# Altium PCB Analog Hall Board.PcbDoc
Units mil, origin at the board's own origin, x right, y up, seen from the top; angles counter-clockwise.
Board outline 750 x 750 mil, 2 copper layers (Top Layer, Bottom Layer); 3 components, 8 nets, 29 pads, 2 vias.
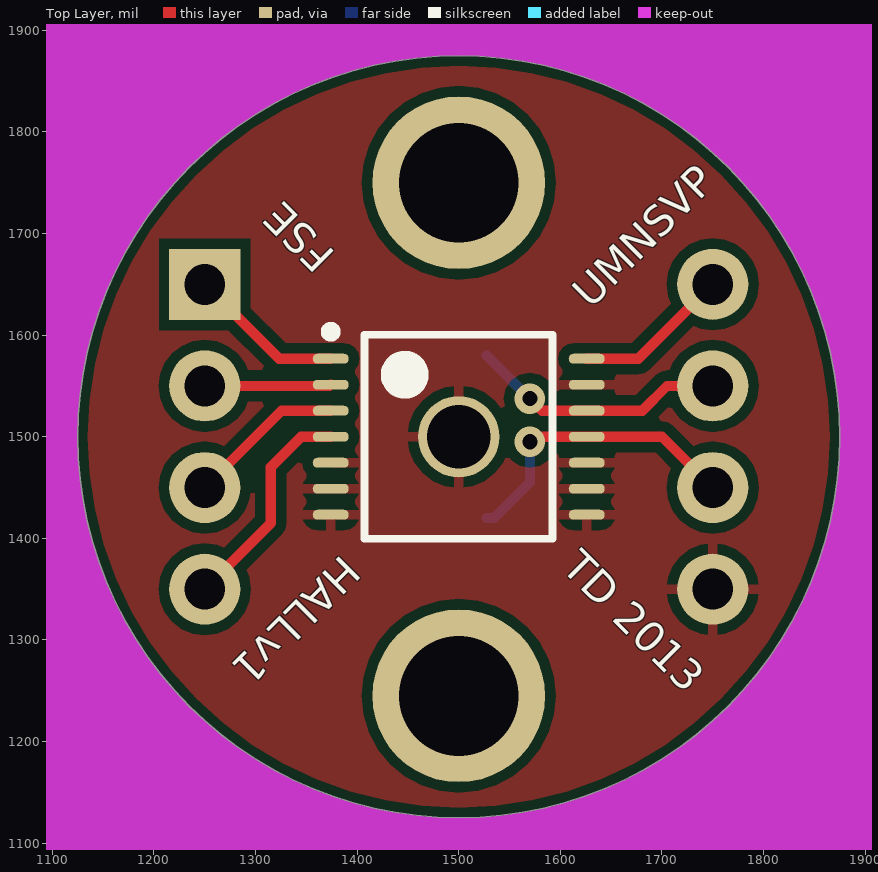
[diagram p0: Top Layer view]
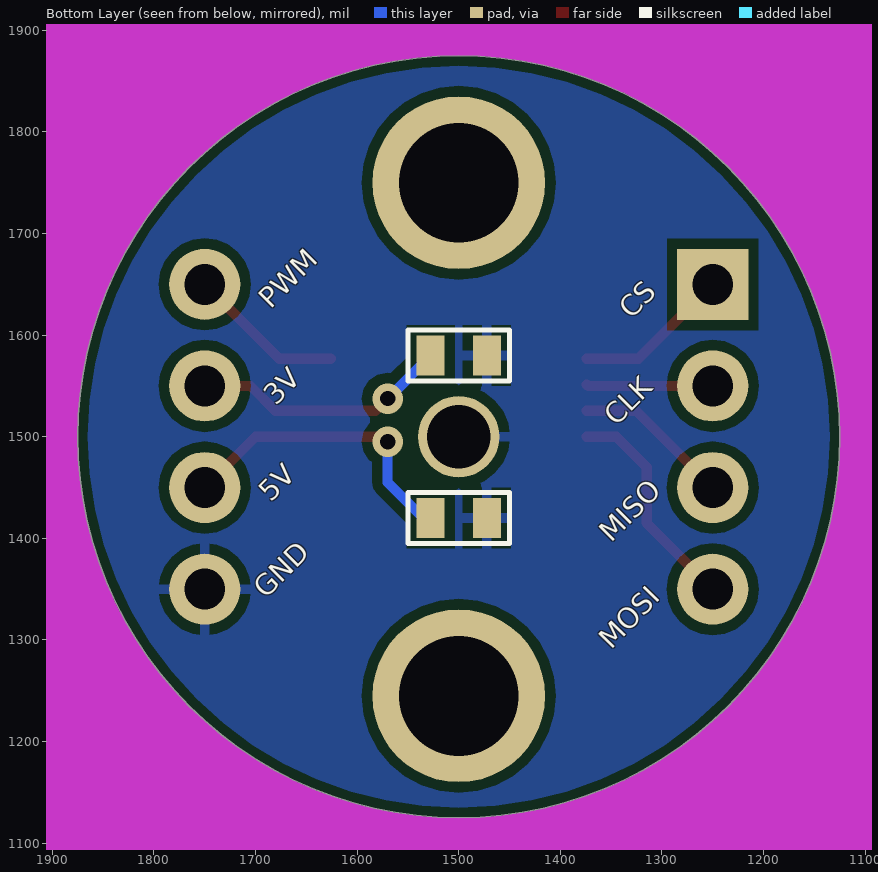
[diagram p1: Bottom Layer view, seen from below]

## Layer stack, top to bottom
Top Layer: signal copper 1.4
Dielectric: dielectric 12.6, FR-4, Dk 4.8
Bottom Layer: signal copper 1.4

## Board outline
1500,1125 cw(c1500,1500) 1125,1500 cw(c1500,1500) 1500,1875 cw(c1500,1500) 1875,1500 cw(c1500,1500)

## Design rules (kind name [scope] priority, off if disabled: settings)
Clearance [All] p1: gap=10
PolygonConnect [All] p1: connectstyle=Relief reliefconductorwidth=10 reliefentries=4 polygonreliefangle="90 Angle" airgapwidth=10
RoutingVias [All] p1: holewidth=28 width=50 viastyle="Through Hole" minholewidth=28 minwidth=50 maxholewidth=28 maxwidth=50
SolderMaskExpansion [All] p1: expansion=4
Width [All] p1: maxlimit=10 minlimit=10 preferedwidth=10
28 further rules are at their usual default settings.

## Classes and differential pairs
component class "Analog Hall Board": ""

## Components (designator, comment, footprint, x,y, rotation, side; value= is the part's Value field where it differs from the comment)
C1 "CAP 0603" 0603_cap 1500,1580 r180 bottom
C2 "CAP 0603" 0603_cap 1500,1420 r180 bottom
U1 "AS5048A Analog Hall Sensor" TSOP65P640X120-14N 1500,1500 r0 top

## Footprints (in the part's own frame and the unit in brackets; to place one, negate y for a bottom-side part, rotate by r counter-clockwise, add the part's x,y. Pads: shape width x height; smd on the part's side, far side on the other; paste and mask are expansions set on the pad)
0603_cap [mm]
  rect 0.7x1 smd: 1(-0.7,0) 2(0.7,0)
  silkscreen extent -1.27,-0.64 1.27,0.64, body extent -0.8,-0.4 0.8,0.4, height 0.3
TSOP65P640X120-14N [mm] "TSOP, 14-Leads, Body 5.00x4.40mm, Pitch 0.65mm, IPC Medium Density"
  oval 0.9x0.25 smd: 1(-3.2,1.95) 2(-3.2,1.3) 3(-3.2,0.65) 4(-3.2,0) 5(-3.2,-0.65) 6(-3.2,-1.3) 7(-3.2,-1.95) 8(3.2,-1.95) 9(3.2,-1.3) 10(3.2,-0.65) 11(3.2,0) 12(3.2,0.65) 13(3.2,1.3) 14(3.2,1.95)
  silkscreen extent -3.32,-2.55 2.35,2.75, body extent -2.25,-2.55 2.25,2.55, height 1.2

## Part data
C1 C2: library part C_0603, "CAP CERM 0603"
U1: library part U_AS5048A, "IC ENCODER ROTARY 14-TSSOP"

## Free pads (board coordinates)
  round 80 hole 62.5: 1(1500,1500)
  round 70 hole 40.16: 2(1250,1350) 2(1250,1450) 2(1250,1550) 2(1750,1350) 2(1750,1450) 2(1750,1550) 2(1750,1650)
  rect 70x70 hole 40.16: 2(1250,1650)
  round 170 hole 118: 3(1500,1245) 3(1500,1750)

## Via types
v1: diameter 30, hole 15, Top Layer to Bottom Layer, 2 vias

## Nets (pads, with @x,y where several pads share a name; then routed paths per layer and width w, separated by ;. In a path a pad name is that pad's centre, name@x,y a point inside that pad or via, vN(x,y) a via of type N, cw(c..) or ccw(c..) an arc to the next point about the centre after c; other vN are vias at no path point)
CLK: pad.2@1250,1550 U1.2 | length 124.5
  Top Layer w10: pad.2@1250,1550 1372.83,1550 U1.2
CS: pad.2@1250,1650 U1.1 | length 154.3
  Top Layer w10: pad.2@1250,1650 1323.23,1576.77 U1.1
GND: C1.2 C2.2 pad.1 pad.2@1750,1350 U1.5 U1.6 U1.7 U1.8 U1.9 U1.10 U1.13
MISO: pad.2@1250,1450 U1.3 | length 155.3
  Top Layer w10: pad.2@1250,1450 1325.59,1525.59 U1.3
MOSI: pad.2@1250,1350 U1.4 | length 218.4
  Top Layer w10: pad.2@1250,1350 1315,1415 1315,1470 1345,1500 U1.4
PWM: pad.2@1750,1650 U1.14 | length 154.3
  Top Layer w10: U1.14 1676.77,1576.77 pad.2@1750,1650
VDD3V: C1.1 pad.2@1750,1550 U1.12 | length 255.1
  Top Layer w10: v1(1570,1537.56) 1581.97,1525.59 U1.12 1680.59,1525.59 1705,1550 pad.2@1750,1550
  Bottom Layer w10: C1.1 v1(1570,1537.56)
VDD5V: C2.1 pad.2@1750,1450 U1.11 | length 299.7
  Top Layer w10: v1(1570,1495) 1575,1500 U1.11 1700,1500 pad.2@1750,1450
  Bottom Layer w10: C2.1 1535,1420 1570,1455 v1(1570,1495)

## Polygon pours and split planes (outlines as drawn)
GND on Top Layer "Top Layer-No Net" (solid, pour order 11): 1125,1875 1875,1875 1875,1125 1125,1125
GND on Bottom Layer "Top Layer-No Net" (solid, pour order 13): 1110,1110 1890,1110 1890,1880 1110,1880

## Keep-outs
Top Layer:
  circle w200: c1500,1500 r475
Bottom Layer:
  circle w200: c1500,1500 r475

## Silkscreen, mask and mechanical layers (free items; w line width, h text height)
Top Overlay:
  text "FSE" at 1380,1680 h30 r135
  text "UMNSVP" at 1630,1625 h30 r45
  text "HALLv1" at 1385,1385 h30 r225
  text "TD 2013" at 1600,1370 h30 r315
Bottom Overlay:
  text "PWM" at 1685,1625 h20 r315
  text "CS" at 1330,1615 h20 r315
  text "3V" at 1680,1530 h20 r315
  text "CLK" at 1345,1510 h20 r315
  text "5V" at 1685,1435 h20 r315
  text "MISO" at 1350,1395 h20 r315
  text "GND" at 1690,1340 h20 r315
  text "MOSI" at 1350,1290 h20 r314
Mechanical 1:
  circle w10: c1500,1500 r375.53